# Altium PCB IBS_TEST.PcbDoc
Units mm, origin at the board's own origin, x right, y up, seen from the top; angles counter-clockwise.
Board outline 53.34 x 34.67 mm, 4 copper layers (Top Layer, GND, PWR, Bottom Layer), stack 0.778 mm thick; 5 components, 7 nets, 13 pads, 4 vias.
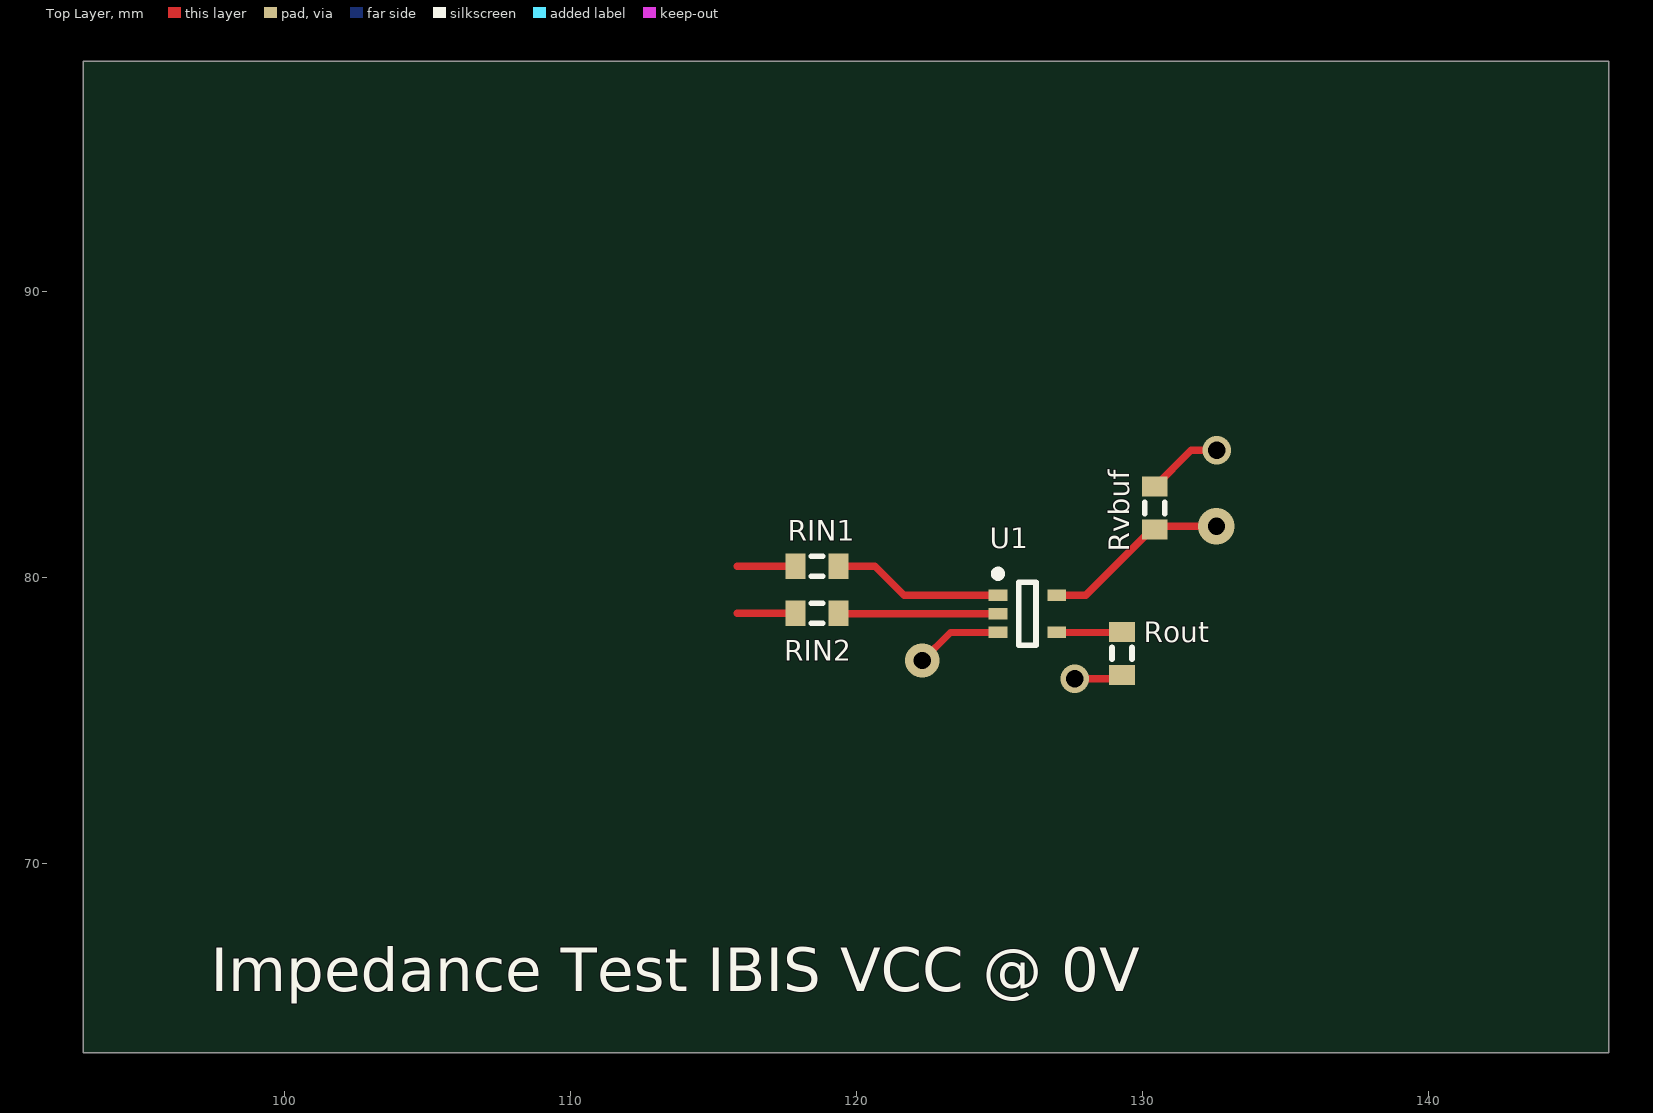
[diagram p0: Top Layer view]
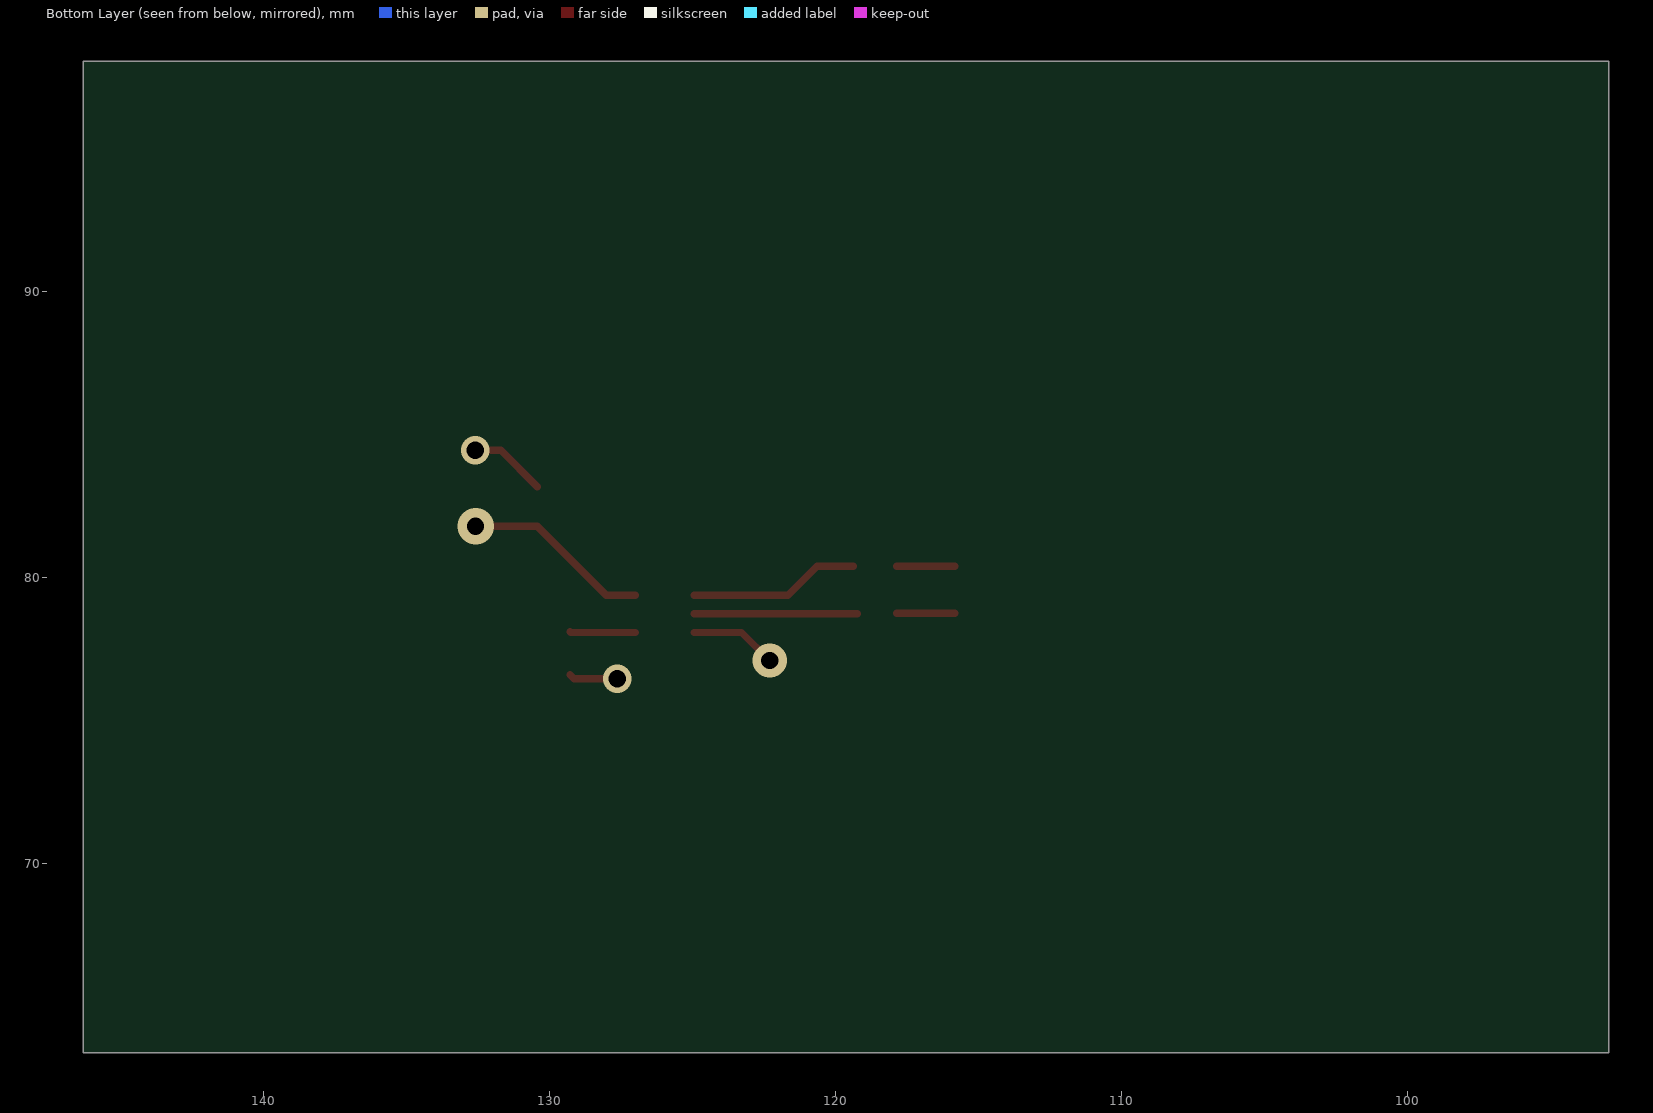
[diagram p1: Bottom Layer view, seen from below]
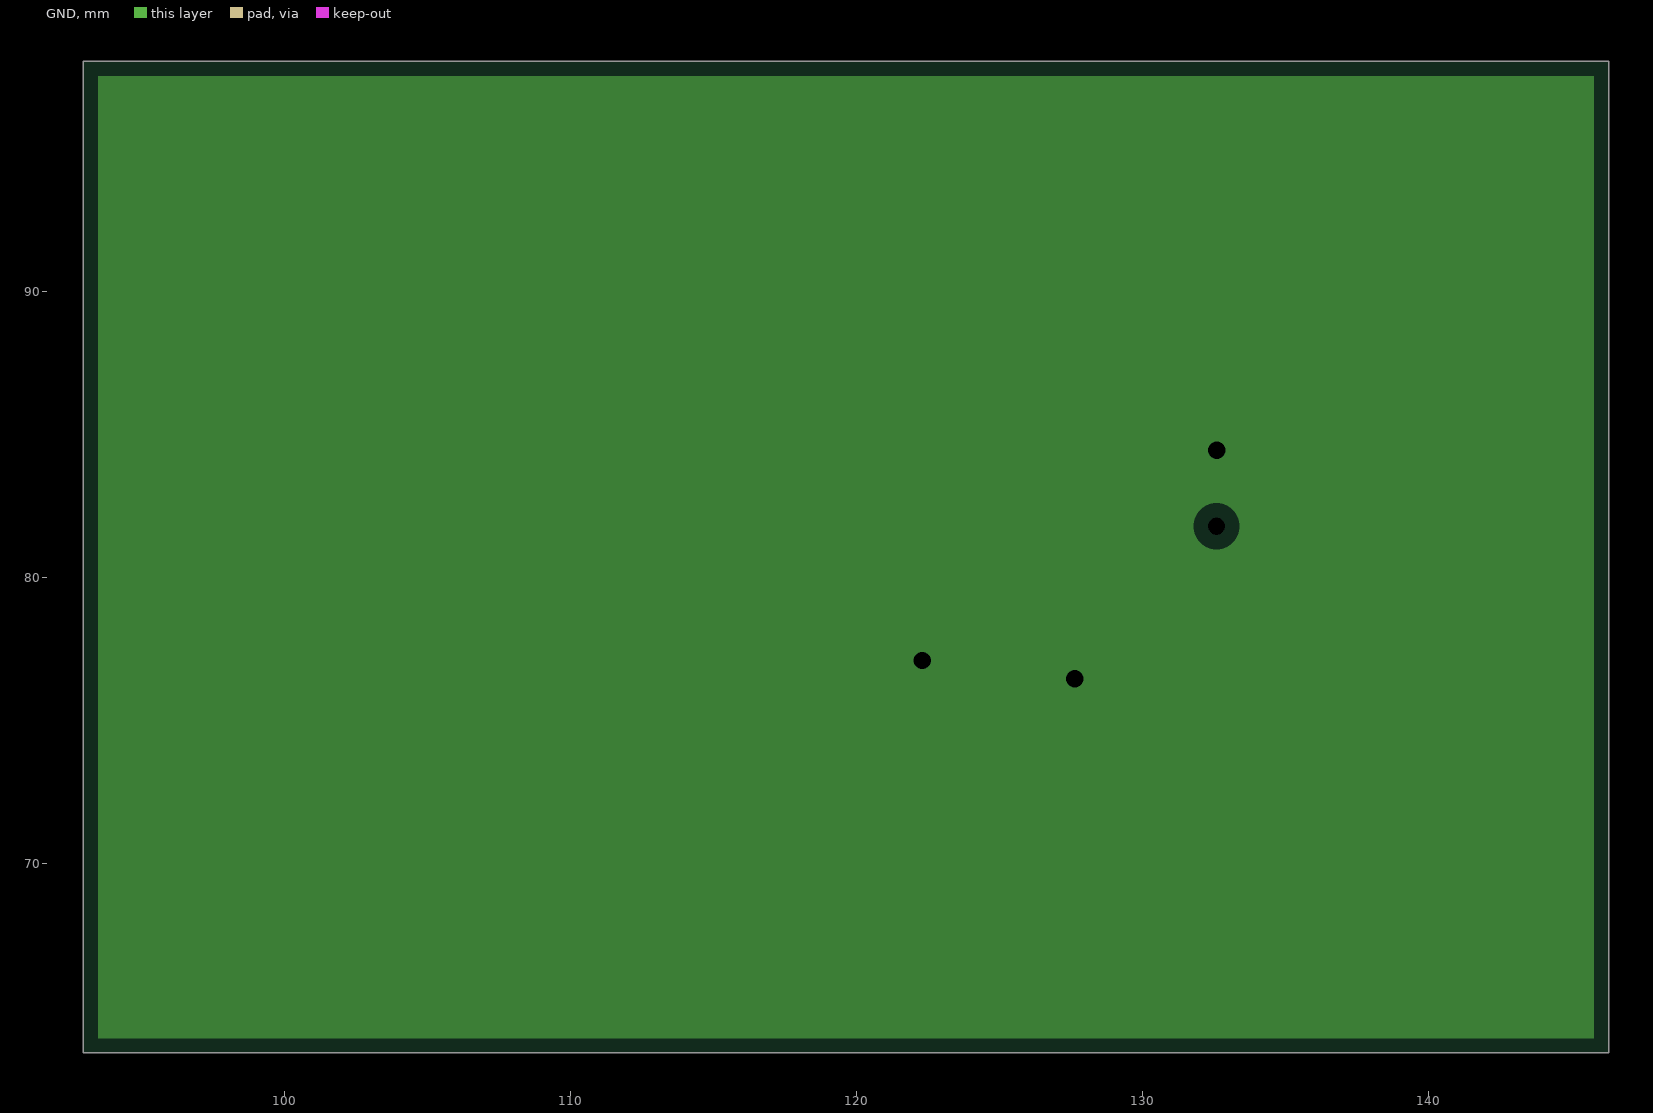
[diagram p2: GND, clearances drawn from the general rule]
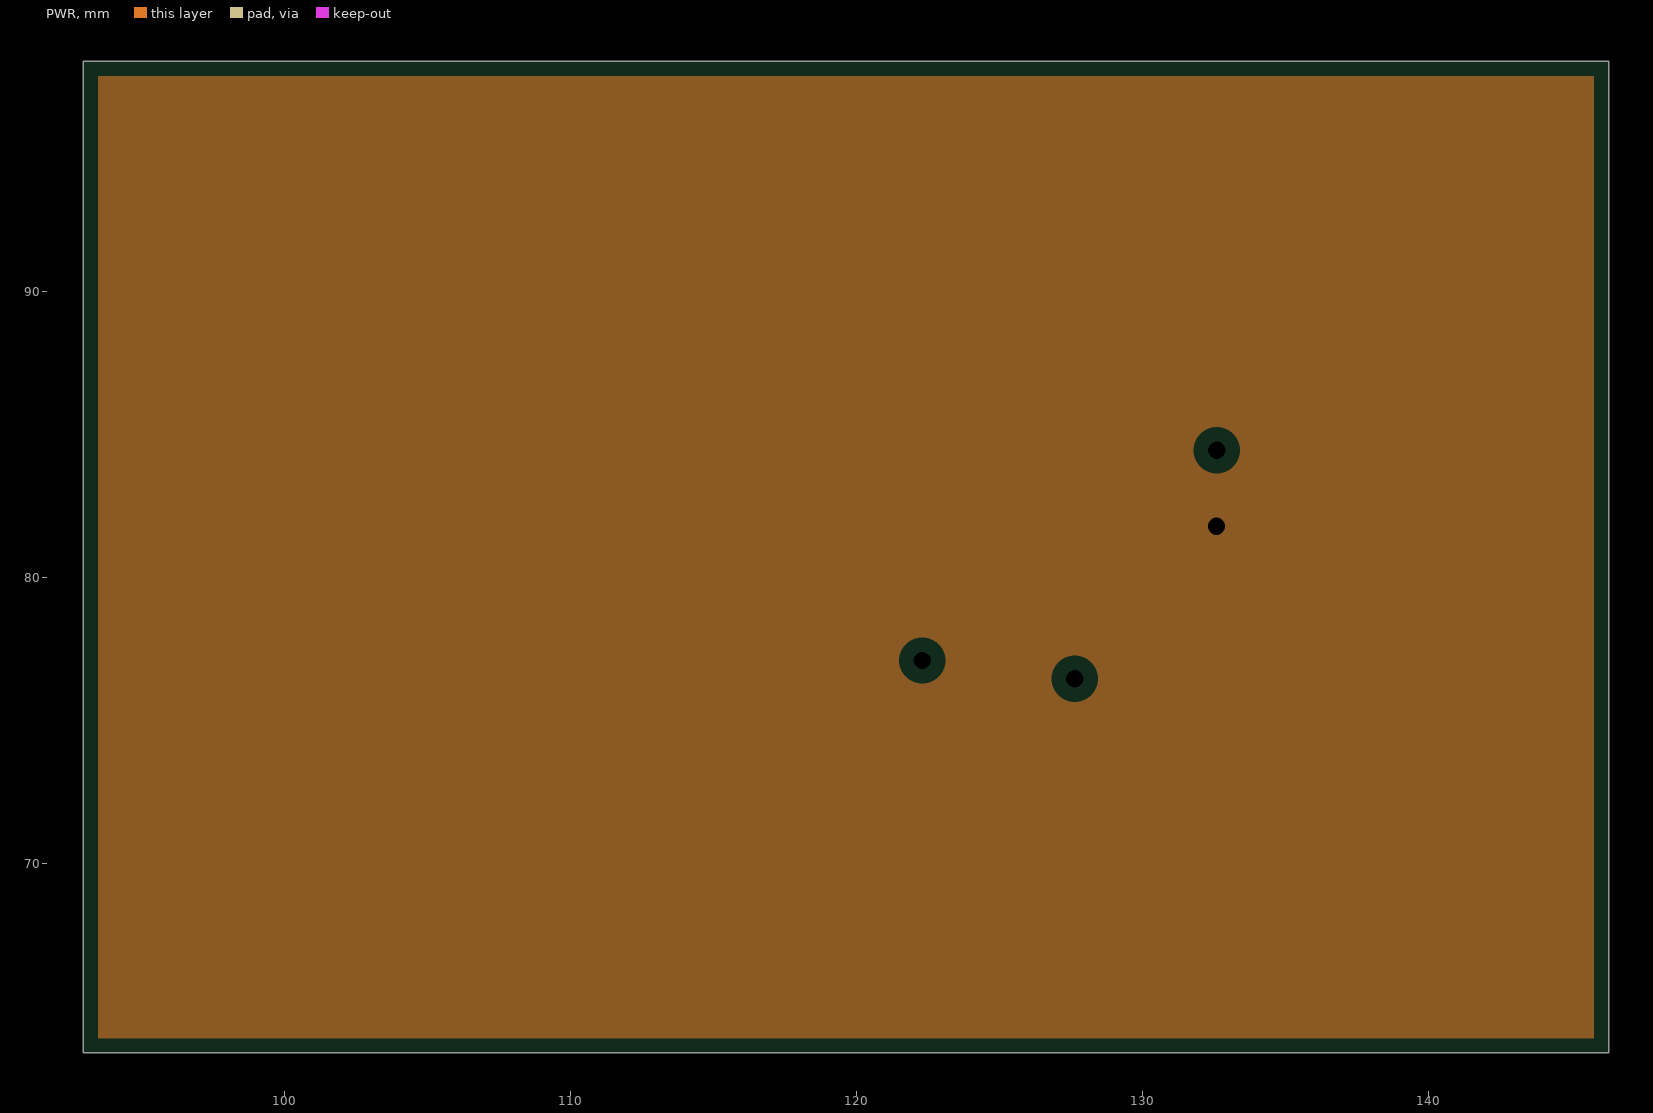
[diagram p3: PWR, clearances drawn from the general rule]

## Layer stack, top to bottom
Top Solder: solder mask 0.0102, Solder Resist, Dk 3.5
Top Layer: signal copper 0.0356
Dielectric 1: core 0.254, FR-4, Dk 4.2
GND: plane copper 0.036, net GND
Dielectric 3: prepreg 0.127, Dk 4.2
PWR: plane copper 0.036, net VCC
Dielectric 2: core 0.254, Dk 4.2
Bottom Layer: signal copper 0.0356
Bottom Solder: solder mask 0.0102, Solder Resist, Dk 3.5

## Board outline
92.964,63.373 146.304,63.373 146.304,98.044 92.964,98.044

## Design rules (kind name [scope] priority, off if disabled: settings)
Clearance [All] p1: gap=0.203 ignorepadtopadclearanceinfootprint=FALSE
PlaneClearance [All] p1: clearance=0.508
PlaneConnect [All] p1: planeconnectstyle=Relief reliefexpansion=0.508 reliefentries=4 reliefconductorwidth=0.254 reliefairgap=0.254
PolygonConnect [All] p1: connectstyle=Relief reliefconductorwidth=0.254 reliefentries=4 polygonreliefangle="90 Angle" airgapwidth=0.254
RoutingVias [All] p1: holewidth=0.6 width=1 viastyle="Through Hole" minholewidth=0.6 minwidth=1 maxholewidth=0.711 maxwidth=1.27
SignalStimulus "SignalStimulus IN1" [InNet('IN1')] p1: kind=2 level=0 starttime=10.00n stoptime=1.035u periodtime=5.000m
SignalStimulus "SignalStimulus IN2" [InNet('IN2')] p2: kind=2 level=1 starttime=10.00n stoptime=1.035u periodtime=5.000m
SolderMaskExpansion [All] p1: expansion=0.102
SupplyNets SupplyNets_GND [InNet('GND')] p1: voltage=0.000
SupplyNets SupplyNets_VCC [InNet('VCC')] p2: voltage=0.000
Width [All] p1: maxlimit=0.254 minlimit=0.254 preferedwidth=0.254
28 further rules are at their usual default settings.

## Components (designator, comment, footprint, x,y, rotation, side; value= is the part's Value field where it differs from the comment)
RIN1 "Res3" J1-0603 118.618,80.391 r0 top value=1K
RIN2 "Res3" J1-0603 118.618,78.74 r0 top value=1K
Rout "Res3" J1-0603 129.286,77.343 r270 top value=5K
Rvbuf "Res3" J1-0603 130.429,82.423 r90 top value=20K
U1 "SN74LVC1G38DCKR" DCK0005A_L 125.975,78.725 r0 top

## Footprints (in the part's own frame and the unit in brackets; to place one, negate y for a bottom-side part, rotate by r counter-clockwise, add the part's x,y. Pads: shape width x height; smd on the part's side, far side on the other; paste and mask are expansions set on the pad)
DCK0005A_L [mm] "SOT23, 5-Leads, Body 2.15x1.4mm, Pitch 0.65mm, IPC High Density"
  rect 0.65x0.4 smd: 1(-1.025,0.65) 2(-1.025,0) 3(-1.025,-0.65) 4(1.025,-0.65) 5(1.025,0.65)
  silkscreen extent -1.15,-1.1 0.3,1.52, body extent -1.14,-1 1.14,1, height 0.94
J1-0603 [mm] "Chip Resistor, Body 1.6x0.8mm, IPC High Density"
  rect 0.7x0.9 smd: 1(-0.75,0) 2(0.75,0)
  silkscreen extent -0.2,-0.35 0.2,0.35, body extent -0.85,-0.48 0.85,0.48, height 0.9

## Part data
RIN1 RIN2 Rout Rvbuf: "Resistor", LatestRevisionDate=29-May-2009, LatestRevisionNote="IPC-7351 Footprint Added.", PackageDescription="Chip Resistor", PackageReference=J1-0603, Published=8-Jun-2000, Publisher="Altium Limited"
U1: library part CMP-0859-00419-2, "Single 2-Input NAND Gate with Open Drain Output, DCK0005A, LARGE T&R", F @ Nom Voltage(Max)(Mhz)=150, Generic Part Number=SN74LVC1G38, ICC @ Nom Voltage(Max)(mA)=0.01, Manufacturer="Texas Instruments", Operating Temperature Range(C)="-40 to 125,-40 to 85", Rating=Catalog, tpd @ Nom Voltage(Max)(ns)=10,6,4.5,3.9, Voltage(Nom)(V)=1.8,2.5,3.3,5, 3-State Output=No, Bits(#)=1, ComponentLink1Description="Manufacturer URL", ComponentLink1URL=http://www.ti.com/, ComponentLink2Description=Datasheet, ComponentLink2URL=http://www.ti.com/lit/ds/symlink/sn74lvc1g38.pdf, DatasheetVersion=SCES538D, Gate Type=NAND, Input Type=CMOS/TTL, Logic=True, Output Drive (IOL/IOH)(Max)(mA)=32/-32, Output Type=CMOS, PackageReference=DCK0005A, PartNumber=SN74LVC1G38DCKR, Schmitt Trigger=No, Sub-Family="NAND Gate", Technology Family=LVC, VCC(Max)(V)=5.5, VCC(Min)(V)=1.65

## Via types
v1: diameter 1, hole 0.6, Top Layer to Bottom Layer, 2 vias
v2: diameter 1.2, hole 0.6, Top Layer to Bottom Layer, 1 vias
v3: diameter 1.27, hole 0.6, Top Layer to Bottom Layer, 1 vias

## Nets (pads, with @x,y where several pads share a name; then routed paths per layer and width w, separated by ;. In a path a pad name is that pad's centre, name@x,y a point inside that pad or via, vN(x,y) a via of type N, cw(c..) or ccw(c..) an arc to the next point about the centre after c; other vN are vias at no path point)
GND: Rout.2 Rvbuf.2 U1.3 | length 7.5
  Top Layer w0.254: v2(122.301,77.089) 123.287,78.075 U1.3 ; v1(127.635,76.454) 129.147,76.454 Rout.2 ; Rvbuf.2 131.699,84.443 v1(132.6,84.443)
IN1: RIN1.1 | length 2
  Top Layer w0.254: 115.824,80.391 RIN1.1
IN2: RIN2.1 | length 2
  Top Layer w0.254: 115.824,78.74 RIN2.1
NetRIN1_2: RIN1.2 U1.1 | length 6
  Top Layer w0.254: RIN1.2 120.65,80.391 121.666,79.375 U1.1
NetRIN2_2: RIN2.2 U1.2 | length 5.7
  Top Layer w0.254: RIN2.2@119.241,78.725 U1.2
VCC: Rvbuf.1 U1.5 | length 6.6
  Top Layer w0.254: U1.5 128.016,79.375 130.429,81.788 v3(132.588,81.788)
Vout: Rout.1 U1.4 | length 2.3
  Top Layer w0.254: U1.4 129.268,78.075 Rout.1

## Polygon pours and split planes (outlines as drawn)
GND on GND (split plane): 145.794,63.883 93.474,63.883 93.474,97.534 145.794,97.534
VCC on PWR (split plane): 145.794,63.883 93.474,63.883 93.474,97.534 145.794,97.534

## Silkscreen, mask and mechanical layers (free items; w line width, h text height)
Top Overlay:
  text "Impedance Test IBIS VCC @ 0V" at 97.409,65.532 h1.52